# EAGLE board GPSsd (EAGLE 9.6.2)
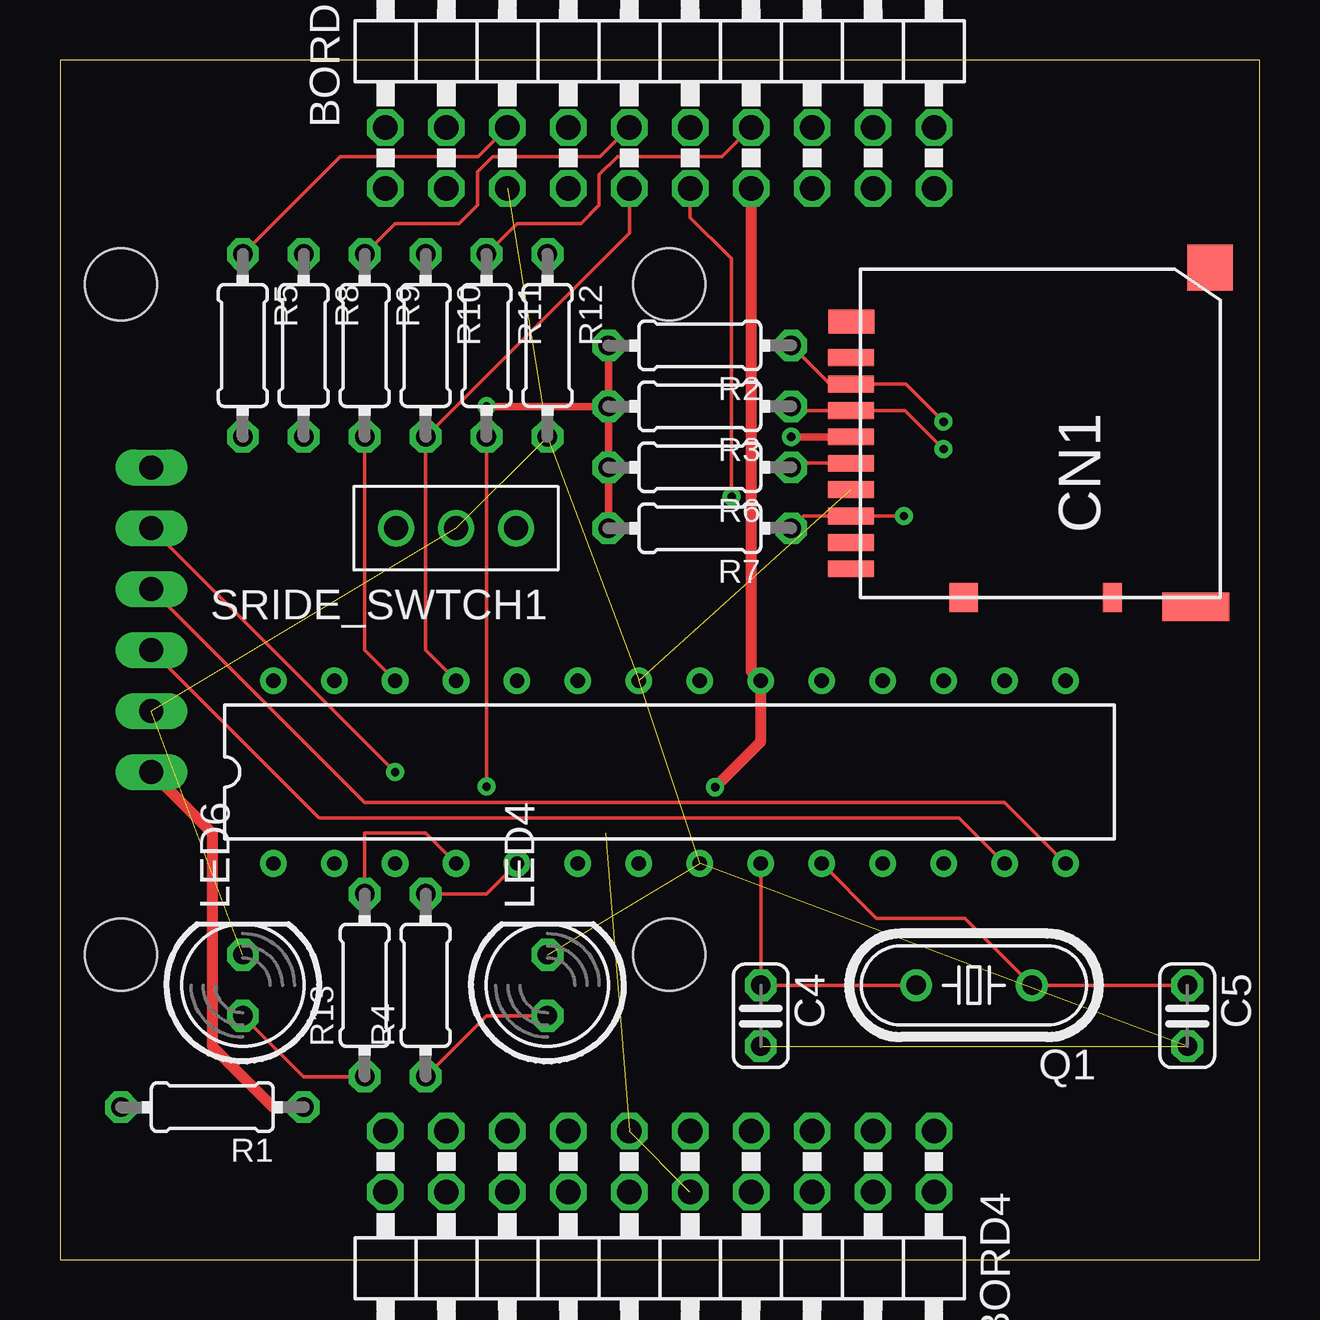
[diagram p0: board, top side]
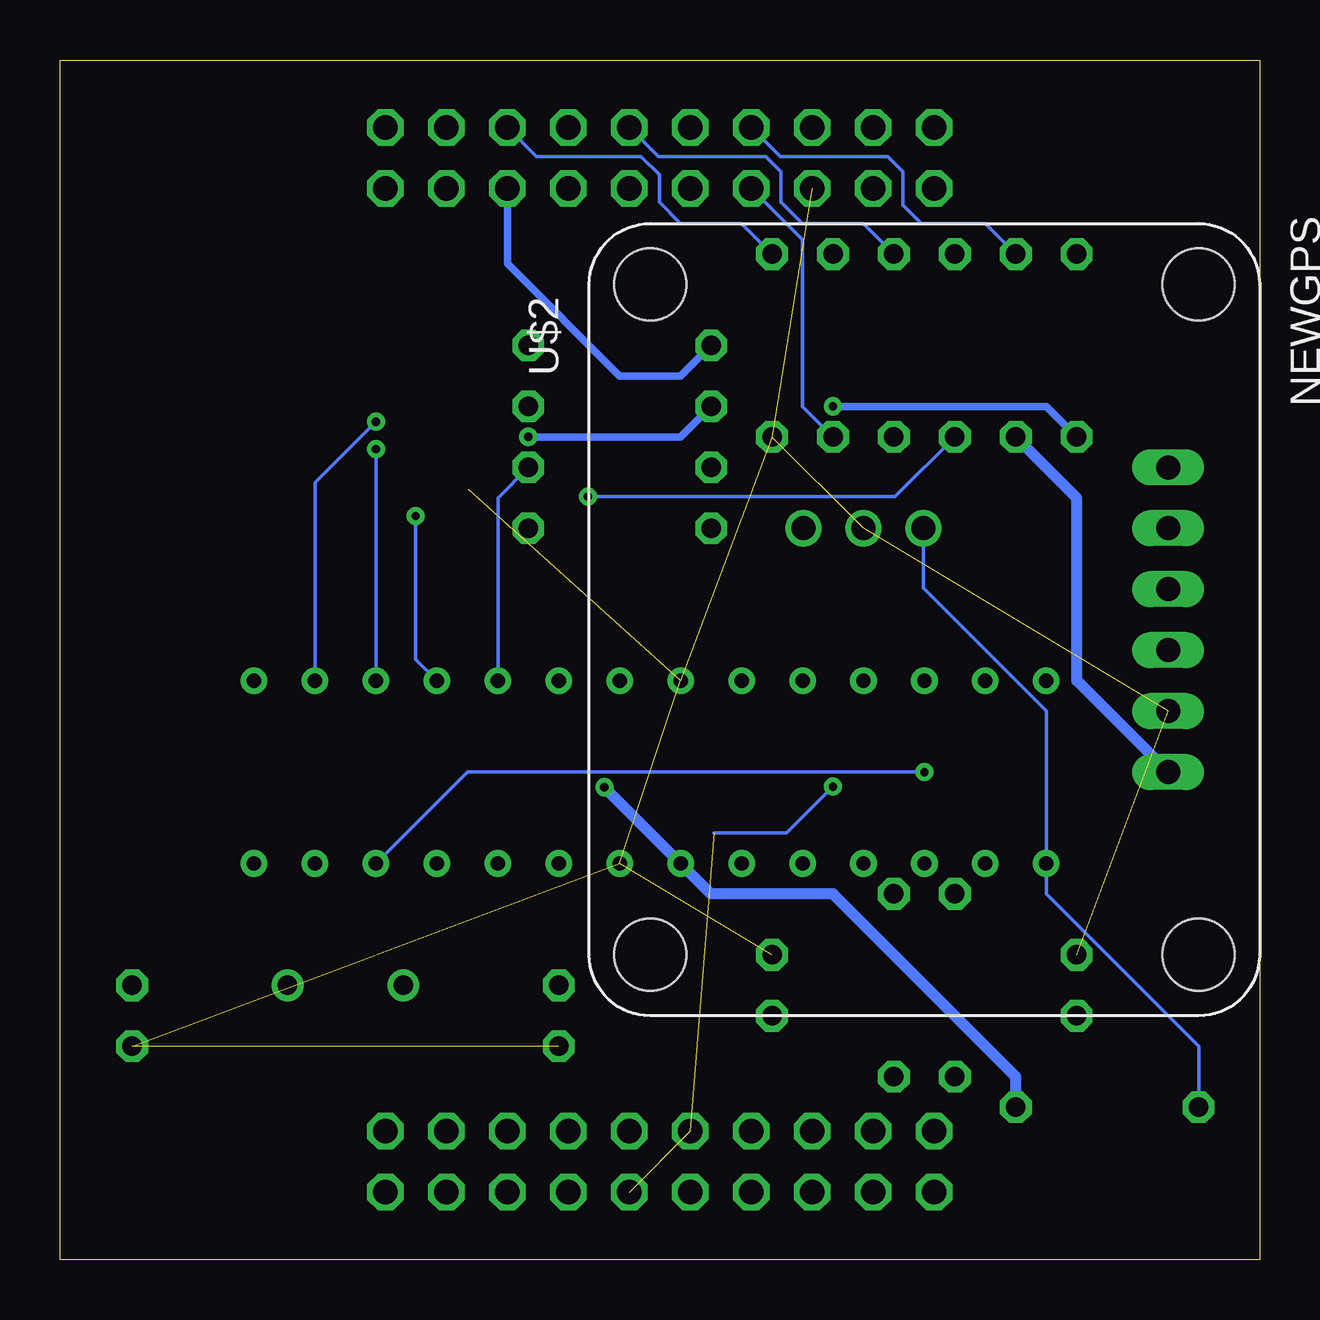
[diagram p1: board, bottom side, seen from below]

Size 50 x 50 mm. Coordinates in mm from the lower left corner, seen from the top.
Outline: 0,0 50,0 50,50 0,50 0,0
Copper layers (1*16): Top 0.035mm / dielectric 1.5mm / Bottom 0.035mm
Design rules "default": minimum track width 6mil, minimum drill 0.35mm, track to track 6mil, track to pad 6mil, pad to pad 6mil, via to via 6mil, smd to smd 6mil, copper to edge 40mil, drill to drill 6mil, minimum pad ring 10mil, minimum via ring 8mil, stop-mask expansion 4mil, vias tented up to drill 0mil, thermal gap 10mil
Net classes: 1 SIGNAL: width 0.152 mm, drill 0.152 mm, clearance 0.152 mm; 2 POWER_H: width 0.457 mm, drill 0.152 mm, clearance 0.152 mm; 3 POWER_L: width 0.305 mm, drill 0.152 mm, clearance 0.152 mm; 4 GND: width 0.305 mm, drill 0.152 mm, clearance 0.152 mm

## Footprints (pad centres in the part's own frame; a part is rotated, then mirrored left to right if it is on the bottom)
2X10/90 = drill 1.016 octagon: 1 -11.43,-6.35; 2 -11.43,-3.81; 3 -8.89,-6.35; 4 -8.89,-3.81; 5 -6.35,-6.35; 6 -6.35,-3.81; 7 -3.81,-6.35; 8 -3.81,-3.81; 9 -1.27,-6.35; 10 -1.27,-3.81; 11 1.27,-6.35; 12 1.27,-3.81; 13 3.81,-6.35; 14 3.81,-3.81; 15 6.35,-6.35; 16 6.35,-3.81; 17 8.89,-6.35; 18 8.89,-3.81; 19 11.43,-6.35; 20 11.43,-3.81
C025-024X044 = drill 0.813 octagon: 1 -1.27,0; 2 1.27,0
DM3AT = smd 0.7 x 1.9: CD/DAT3 2.2,6.4; CLK -1.1,6.4; CMD 1.1,6.4; DAT0 -3.3,6.4; DAT1 -4.4,6.4; DAT2 3.3,6.4; DET_B -5.5,6.4; VDD 0,6.4; VSS -2.2,6.4 | smd 1.2 x 0.8: DET_A -6.7,-4.5 | smd 1 x 1.9: P$9 4.8,6.381 | smd 1.2 x 1.2: P$11 -6.7,1.7 | smd 1.2 x 2.8: P$13 -7.081,-7.973 | smd 1.9 x 1.9: P$14 7.054,-8.562
LED5MM = drill 0.813 octagon: A -1.27,0; K 1.27,0
HC49/S = drill 0.813: 1 -2.413,0; 2 2.413,0
0204/7 = drill 0.813 octagon: 1 -3.81,0; 2 3.81,0
SRIDE_SWITCH = drill 1: L -2.5,0; LR 0,0; R 2.5,0
ATMEGA328P = drill 0.6: AREF 17.78,7.62; AVCC 20.32,7.62; D1TX 5.08,0; D2 7.62,0; D3 10.16,0; D4 12.7,0; D5 25.4,0; D6 27.94,0; D7 30.48,0; D8 33.02,0; D9 33.02,7.62; D14 12.7,7.62; D15 10.16,7.62; D16 7.62,7.62; D17 5.08,7.62; GND1 17.78,0; GND2 15.24,7.62; MISOD12 25.4,7.62; MOSID11 27.94,7.62; PB6 20.32,0; PB7 22.86,0; RESET 0,0; RXD0 2.54,0; SCKD13 22.86,7.62; SCLD19 0,7.62; SDAD18 2.54,7.62; SSD10 30.48,7.62; VCC 15.24,0
NEWGPS = drill 1 long: 5V 10.16,-24.13; EN 22.86,-24.13; GND 12.7,-24.13; RST 20.32,-24.13; RX 17.78,-24.13; TX 15.24,-24.13 | hole 3: 2.54,-2.54; 30.48,-2.54; 30.48,-25.4; 2.54,-25.4

## Placement (x,y rotation side)
BORD1  [2X10/90]  25,51 0 top
BORD4  [2X10/90]  25,-1 180 top
C4  22p  [C025-024X044]  29.21,10.16 270 top
C5  22p  [C025-024X044]  46.99,10.16 270 top
CN1  DM3AT  [DM3AT]  39.37,34.29 90 top
LED4  [LED5MM]  20.32,11.43 90 top
LED6  [LED5MM]  7.62,11.43 90 top
Q1  16mhz  [HC49/S]  38.1,11.43 180 top
R1  [0204/7]  6.35,6.35 180 top
R2  10k  [0204/7]  26.67,38.1 180 top
R3  10k  [0204/7]  26.67,35.56 180 top
R4  100  [0204/7]  15.24,11.43 90 top
R5  [0204/7]  7.62,38.1 270 top
R6  10k  [0204/7]  26.67,33.02 180 top
R7  10k  [0204/7]  26.67,30.48 180 top
R8  [0204/7]  10.16,38.1 270 top
R9  [0204/7]  12.7,38.1 270 top
R10  [0204/7]  15.24,38.1 270 top
R11  [0204/7]  17.78,38.1 270 top
R12  [0204/7]  20.32,38.1 270 top
R13  100  [0204/7]  12.7,11.43 90 top
SRIDE_SWTCH1  SRIDE_SWITCH  [SRIDE_SWITCH]  16.51,30.48 180 top
U$1  ATMEGA238P  [ATMEGA328P]  8.89,16.51 0 top
U$2  NEWGPS  [NEWGPS]  27.94,10.16 90 bottom

## Library data of the parts
BORD1 BORD4 = pinhead
C4 C5 = rcl; SPICEPREFIX: C
CN1 = microSD
LED4 LED6 = led
Q1 = crystal; OC_FARNELL: 1667008; OC_NEWARK: unknown
R1-R13 = rcl; SPICEPREFIX: R
SRIDE_SWTCH1 = Sride Switch
U$1 = atmega328p
U$2 = New_GPS

## Nets
+3V3 [POWER_L]: BORD1.15 CN1.VDD R2.2 R3.2 R5.2 R6.2 R7.2
+5V [POWER_H]: BORD1.13 R1.1 R8.2 U$1.AVCC U$1.VCC U$2.5V
BORDRX [SIGNAL]: BORD1.11 R9.2 U$1.D17
BORDTX [SIGNAL]: BORD1.9 R10.2 U$1.D16
CLK [SIGNAL]: CN1.CLK R6.1 U$1.SCKD13
GND [GND]: BORD1.5 C4.2 C5.2 CN1.VSS LED4.K LED6.K R12.2 SRIDE_SWTCH1.LR U$1.GND1 U$1.GND2 U$2.GND
GPSRX [SIGNAL]: U$1.D7 U$2.TX
GPSTX [SIGNAL]: U$1.D8 U$2.RX
LED1.0 [SIGNAL]: R13.2 U$1.D2
LED1.1 [SIGNAL]: R4.2 U$1.D3
N$1 [SIGNAL]: LED6.A R13.1
N$2 [SIGNAL]: BORD1.6 R5.1
N$3 [SIGNAL]: BORD1.8 R8.1
N$4 [SIGNAL]: BORD1.10 R9.1
N$5 [SIGNAL]: C5.1 Q1.1 U$1.PB7
N$6: R1.2 SRIDE_SWTCH1.R U$1.RESET
N$7 [SIGNAL]: C4.1 Q1.2 U$1.PB6
N$8 [SIGNAL]: BORD1.12 R10.1
N$9 [SIGNAL]: BORD1.14 R11.1
N$10 [SIGNAL]: BORD1.16 R12.1
N$11 [SIGNAL]: LED4.A R4.1
N$15 [SIGNAL]: U$2.EN
RST [SIGNAL]: U$1.D6 U$2.RST
SD-MISO [SIGNAL]: CN1.DAT0 R7.1 U$1.MISOD12
SD-MOSI [SIGNAL]: CN1.CMD R3.1 U$1.MOSID11
SD-SS [SIGNAL]: CN1.CD/DAT3 R2.1 U$1.SSD10
SERVO [SIGNAL]: BORD1.7 BORD4.10 BORD4.11 R11.2

## Tracks (layer width: path | path; a pad name or v marks a point on that pad's centre or on a via)
+3V3  (via drill 0.35)
  Top 0.305: R2.2 R3.2 | R3.2 R6.2 R7.2 | v30.48,34.29 CN1.VDD | v17.78,35.56 R3.2
  Bottom 0.305: R3.2 24.13,34.29 v30.48,34.29 | BORD1.15 31.35,41.51 26.67,36.83 24.13,36.83 R2.2 | R5.2 8.89,35.56 v17.78,35.56
+5V  (via drill 0.35)
  Top 0.457: U$2.5V 6.35,17.78 6.35,8.89 8.89,6.35 R1.1 | BORD1.13 28.81,24.53 U$1.AVCC 29.21,21.59 v27.3,19.68
  Bottom 0.457: U$2.5V 7.62,24.13 7.62,31.75 R8.2 | R1.1 10.16,7.62 17.78,15.24 22.86,15.24 U$1.VCC v27.3,19.68
BORDRX  (via drill 0.35)
  Top 0.152: U$1.D17 12.7,25.4 R9.2 | BORD1.11 26.27,43.44 27.87,41.84 27.99,41.71 v27.99,31.8
  Bottom 0.152: v27.99,31.8 15.19,31.8 R9.2
BORDTX
  Top 0.152: U$1.D16 15.24,25.4 R10.2 23.73,42.78 BORD1.9
CLK
  Top 0.152: R6.1 30.65,33.19 CN1.CLK
  Bottom 0.152: R6.1 31.75,31.75 U$1.SCKD13
GND  (10 unrouted)
GPSRX
  Top 0.152: U$1.D7 37.47,18.41 10.79,18.41 U$2.TX
GPSTX
  Top 0.152: U$2.RX 12.7,19.05 39.37,19.05 U$1.D8
LED1.0
  Top 0.152: R13.2 12.7,17.78 15.24,17.78 U$1.D2
LED1.1
  Top 0.152: R4.2 17.78,15.24 U$1.D3
N$1
  Top 0.152: LED6.A 10.16,7.62 R13.1
N$2
  Top 0.152: R5.1 11.68,45.97 17.43,45.97 BORD1.6
N$3
  Bottom 0.152: R8.1 11.43,43.18 14.1,43.18 14.86,43.94 14.86,45.34 15.49,45.97 19.97,45.97 BORD1.8
N$4
  Top 0.152: R9.1 13.97,43.18 16.64,43.18 17.4,43.94 17.4,45.34 18.03,45.97 22.51,45.97 BORD1.10
N$5
  Top 0.152: U$1.PB7 34.04,14.22 37.72,14.22 Q1.1 C5.1
N$6
  Bottom 0.152: SRIDE_SWTCH1.R 14.01,27.98 8.89,22.86 U$1.RESET 8.89,15.24 2.54,8.89 R1.2
N$7
  Top 0.152: U$1.PB6 C4.1 Q1.2
N$8
  Bottom 0.152: R10.1 16.51,43.18 19.05,43.18 19.94,44.07 19.94,45.34 20.57,45.97 25.05,45.97 BORD1.12
N$9
  Top 0.152: R11.1 19.05,43.18 21.72,43.18 22.48,43.94 22.48,45.21 23.24,45.97 27.59,45.97 BORD1.14
N$10
  Bottom 0.152: R12.1 21.59,43.18 24.13,43.18 25.02,44.07 25.02,45.21 25.78,45.97 30.13,45.97 BORD1.16
N$11
  Top 0.152: R4.1 17.78,10.16 LED4.A
RST  (via drill 0.35)
  Top 0.152: v13.97,20.32 U$2.RST
  Bottom 0.152: U$1.D6 33.02,20.32 v13.97,20.32
SD-MISO  (via drill 0.35)
  Top 0.152: R7.1 30.99,30.99 CN1.DAT0 v35.18,30.99
  Bottom 0.152: U$1.MISOD12 35.18,25.02 v35.18,30.99
SD-MOSI  (via drill 0.35)
  Top 0.152: R3.1 30.65,35.39 CN1.CMD 35.22,35.39 v36.83,33.78
  Bottom 0.152: U$1.MOSID11 v36.83,33.78
SD-SS  (via drill 0.35)
  Top 0.152: R2.1 32.09,36.49 CN1.CD/DAT3 35.27,36.49 v36.83,34.92
  Bottom 0.152: v36.83,34.92 39.37,32.38 U$1.SSD10
SERVO  (via drill 0.35)  (2 unrouted)
  Top 0.152: R11.2 17.78,19.81 v17.78,19.71
  Bottom 0.152: BORD1.7 19.05,42.51 19.05,35.56 R11.2 | v17.78,19.71 19.71,17.78 22.73,17.78